# Altium PCB PCB1.PcbDoc
Units mm, origin at the board's own origin, x right, y up, seen from the top; angles counter-clockwise.
Board outline 19.56 x 44.7 mm, 2 copper layers (Top Layer, Bottom Layer); 3 components, 5 nets, 18 pads, 0 vias.
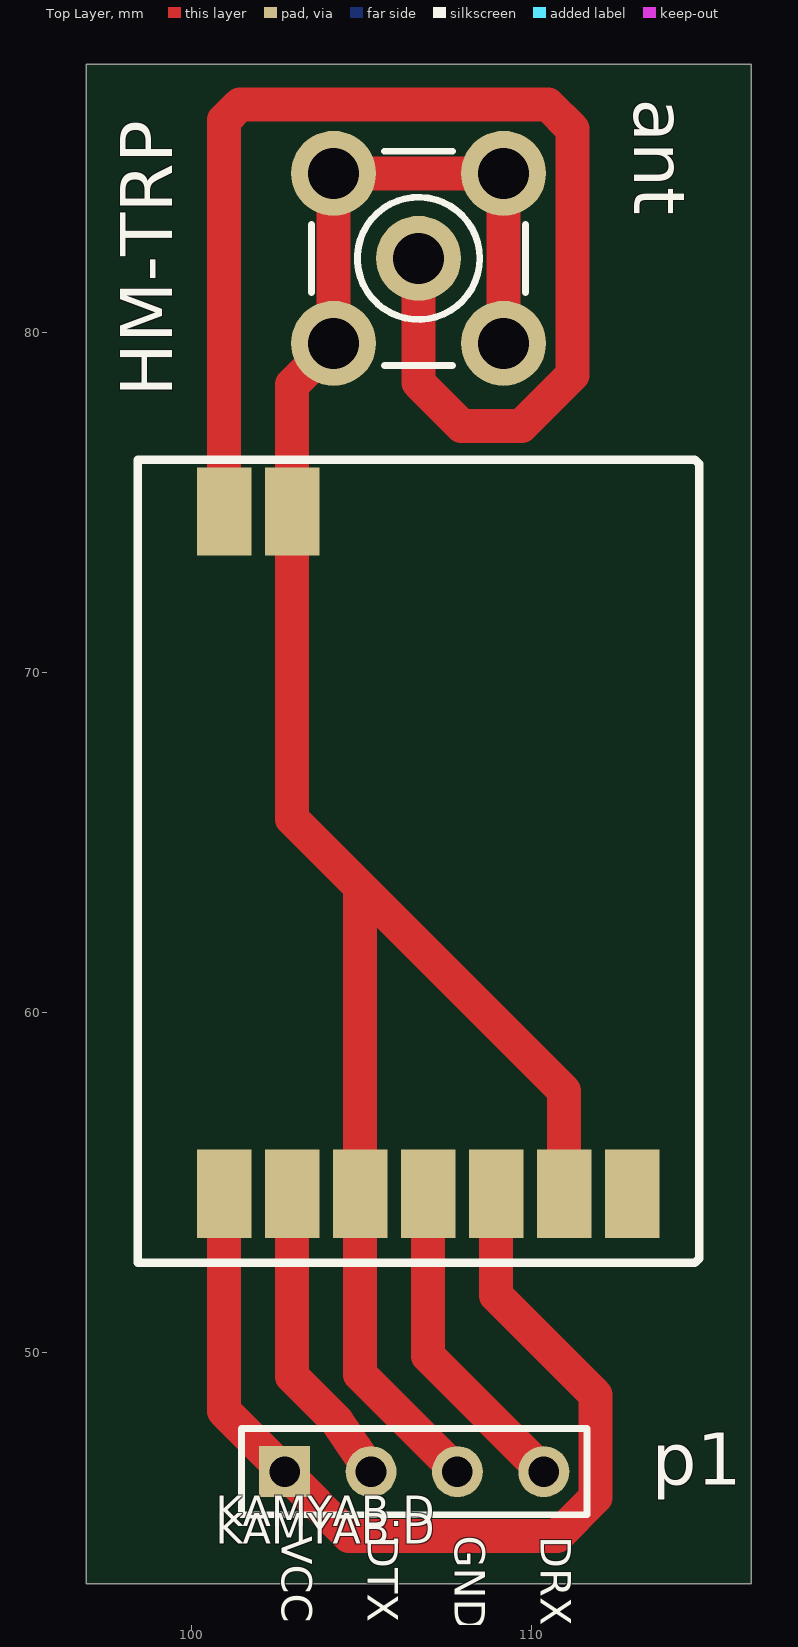
[diagram p0: Top Layer view]
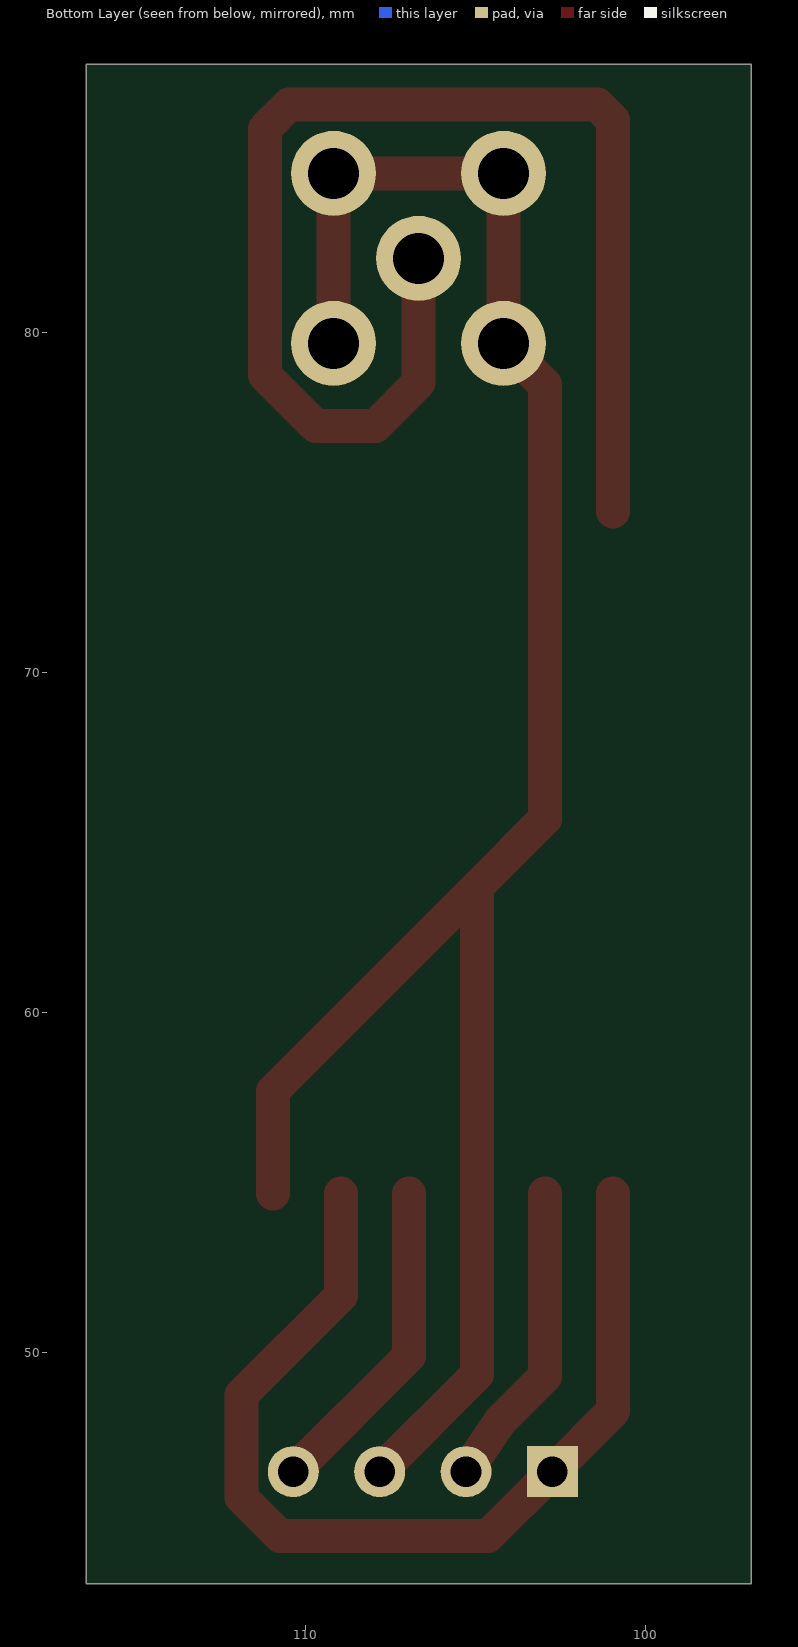
[diagram p1: Bottom Layer view, seen from below]

## Layer stack, top to bottom
Top Solder: solder mask 0.0102, Solder Resist, Dk 3.5
Top Layer: signal copper 0.0356
Dielectric 1: dielectric 0.32, FR-4, Dk 4.8
Bottom Layer: signal copper 0.0356
Bottom Solder: solder mask 0.0102, Solder Resist, Dk 3.5

## Board outline
96.901,43.18 116.459,43.18 116.459,87.884 96.901,87.884

## Design rules (kind name [scope] priority, off if disabled: settings)
Clearance [All] p1: gap=0.254
PolygonConnect [All] p1: connectstyle=Relief reliefconductorwidth=0.254 reliefentries=4 polygonreliefangle="90 Angle" airgapwidth=0.254
RoutingVias [All] p1: holewidth=0.711 width=1.27 viastyle="Through Hole" minholewidth=0.711 minwidth=1.27 maxholewidth=0.711 maxwidth=1.27
SolderMaskExpansion [All] p1: expansion=0.102
Width [All] p1: maxlimit=1 minlimit=1 preferedwidth=1
30 further rules are at their usual default settings.

## Components (designator, comment, footprint, x,y, rotation, side; value= is the part's Value field where it differs from the comment)
ant "SMB" SMB_V-RJ45 106.68,82.169 r0 top
HM-TRP "HM-TRP" PCBComponent_1 106.426,64.436 r0 top
p1 "Header 4" HDR1X4 102.743,46.482 r0 top

## Footprints (in the part's own frame and the unit in brackets; to place one, negate y for a bottom-side part, rotate by r counter-clockwise, add the part's x,y. Pads: shape width x height; smd on the part's side, far side on the other; paste and mask are expansions set on the pad)
HDR1X4 [mm] "Connector; Header; 4 Position"
  rect 1.5x1.5 hole 0.9: 1(0,0)
  round 1.5 hole 0.9: 2(2.54,0) 3(5.08,0) 4(7.62,0)
  silkscreen extent -1.27,-1.27 8.89,1.27
PCBComponent_1 [mm]
  rect 1.6x2.6 smd: 1(-5.461,-9.779) 2(-3.461,-9.779) 3(-1.461,-9.779) 4(0.539,-9.779) 5(2.539,-9.779) 6(4.539,-9.779) 7(6.539,-9.779) 8(-5.461,10.287) 9(-3.461,10.287)
  silkscreen extent -8,-11.81 8.51,11.81
SMB_V-RJ45 [mm] "Connector; SMB Straight"
  round 2.5 hole 1.5: 1(0,0) 2(-2.5,-2.5) 2(-2.5,2.5) 2(2.5,-2.5) 2(2.5,2.5)
  silkscreen extent -3.15,-3.15 3.15,3.15

## Part data
ant: "SMB Straight Connector"
HM-TRP: library part Component_1
p1: "Header, 4-Pin"

## Nets (pads, with @x,y where several pads share a name; then routed paths per layer and width w, separated by ;. In a path a pad name is that pad's centre, name@x,y a point inside that pad or via, vN(x,y) a via of type N, cw(c..) or ccw(c..) an arc to the next point about the centre after c; other vN are vias at no path point)
GND: ant.2 HM-TRP.3 HM-TRP.6 HM-TRP.9 p1.3 | length 62.2
  Top Layer w1: p1.3 104.965,49.34 HM-TRP.3 104.965,63.678 ; ant.2@109.18,79.669 109.18,84.669 104.18,84.669 104.18,79.669 102.965,78.454 HM-TRP.9 102.965,65.678 104.965,63.678 ; HM-TRP.6 110.965,57.678 104.965,63.678
Netant_1: ant.1 HM-TRP.8 | length 38.8
  Top Layer w1: HM-TRP.8 100.965,86.233 101.422,86.69 110.49,86.69 111.201,85.979 111.201,78.74 109.703,77.241 107.95,77.241 106.68,78.511 ant.1
NetHM-TRP_1: HM-TRP.1 HM-TRP.5 p1.1 | length 29.5
  Top Layer w1: HM-TRP.1 100.965,48.26 p1.1 104.635,44.59 110.757,44.59 111.887,45.72 111.887,48.743 108.965,51.665 HM-TRP.5
NetHM-TRP_2: HM-TRP.2 p1.2 | length 9
  Top Layer w1: HM-TRP.2 102.965,49.283 104.267,47.981 p1.2
NetHM-TRP_4: HM-TRP.4 p1.4 | length 9.6
  Top Layer w1: HM-TRP.4 106.965,49.88 p1.4
pads on no net: HM-TRP.7

## Silkscreen, mask and mechanical layers (free items; w line width, h text height)
Top Overlay:
  text "GND" at 107.454,44.59 h1.52 r270
  text "KAMYAB.D" at 100.711,44.577 h1.52
  text "VCC" at 102.362,44.577 h1.52 r270
  text "DTX" at 104.891,44.577 h1.52 r270
  text "DRX" at 109.982,44.577 h1.52 r270
  text "KAMYAB.D" at 100.711,44.069 h1.52